# Altium PCB stm32f407pin.PcbDoc
Units mm, origin at the board's own origin, x right, y up, seen from the top; angles counter-clockwise.
Board outline 102.49 x 67.44 mm, 2 copper layers (Top Layer, Bottom Layer); 4 components, 100 nets, 200 pads, 0 vias.
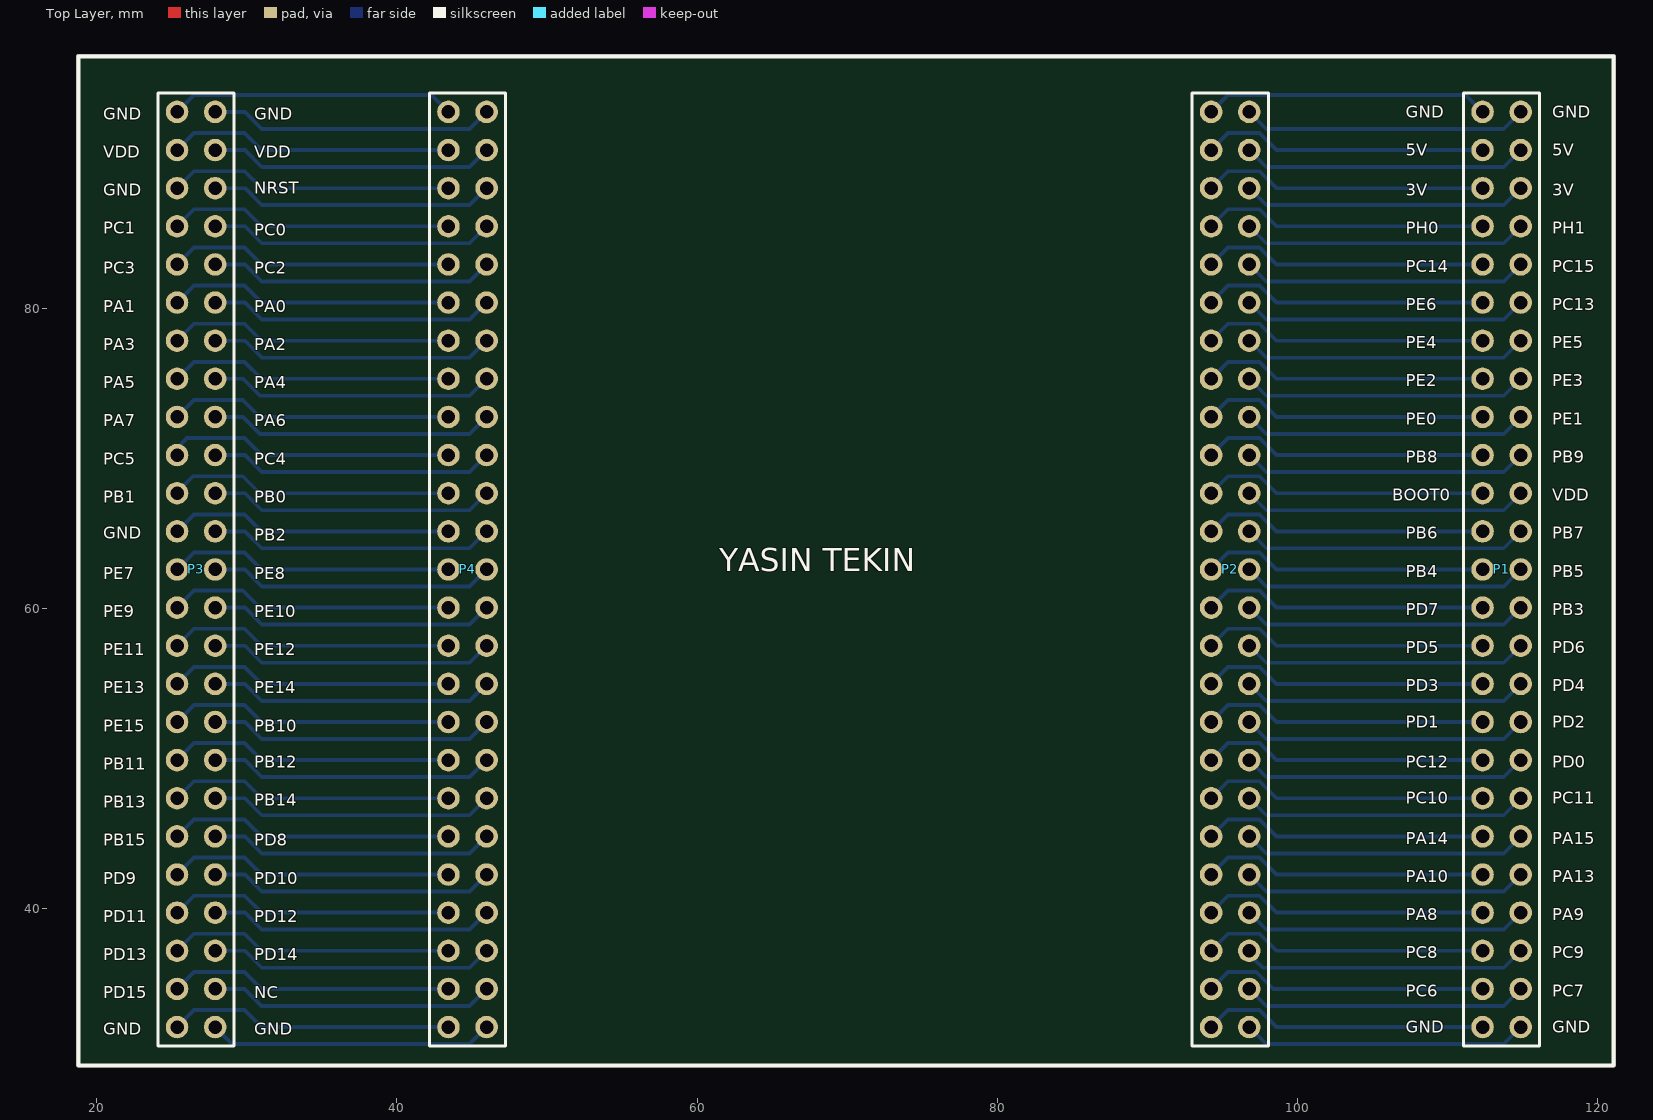
[diagram p0: Top Layer view]
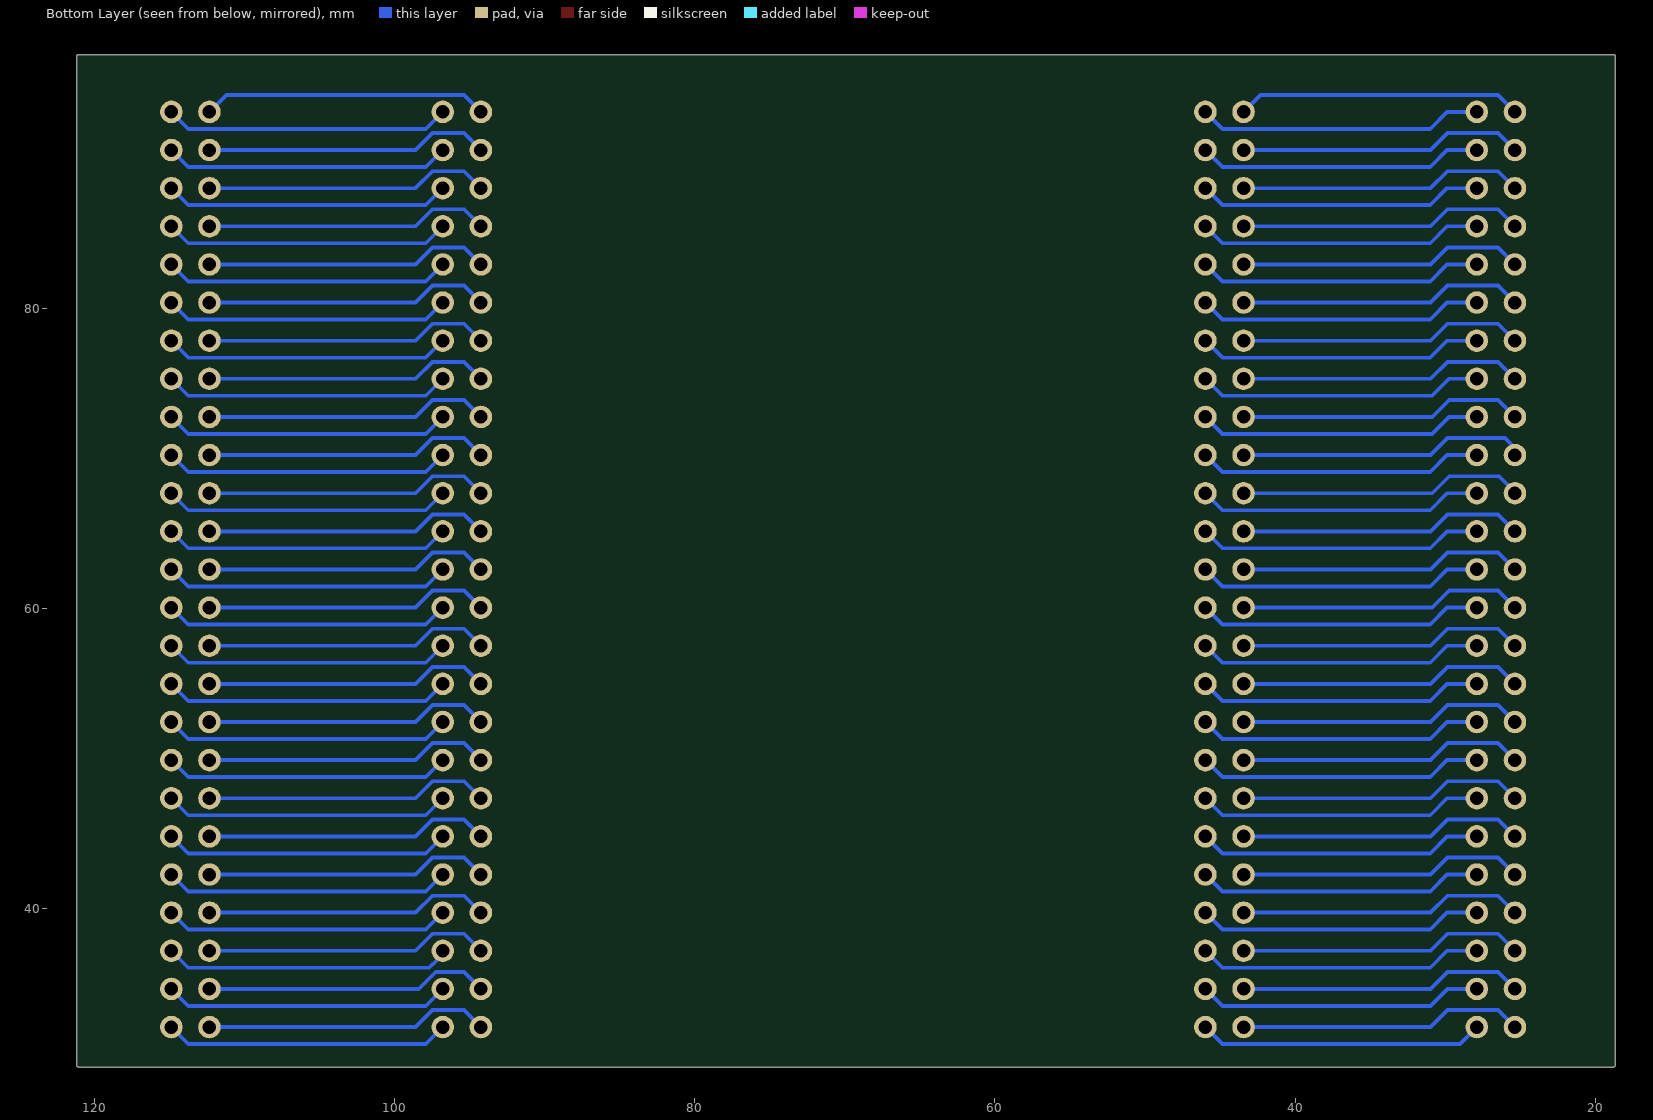
[diagram p1: Bottom Layer view, seen from below]

## Layer stack, top to bottom
Top Solder: solder mask 0.0102, Solder Resist, Dk 3.5
Top Layer: signal copper 0.0356
Dielectric 1: dielectric 0.32, FR-4, Dk 4.8
Bottom Layer: signal copper 0.0356
Bottom Solder: solder mask 0.0102, Solder Resist, Dk 3.5

## Board outline
18.796,29.464 cw(c18.796,29.591) 18.669,29.591 18.669,96.774 cw(c18.796,96.774) 18.796,96.901 121.031,96.901 cw(c121.031,96.774) 121.158,96.774 121.158,29.591 cw(c121.031,29.591) 121.031,29.464

## Design rules (kind name [scope] priority, off if disabled: settings)
Clearance [All] p1: gap=0.254
PolygonConnect [All] p1: connectstyle=Relief reliefconductorwidth=0.254 reliefentries=4 polygonreliefangle="90 Angle" airgapwidth=0.254
RoutingVias [All] p1: holewidth=0.711 width=1.27 viastyle="Through Hole" minholewidth=0.711 minwidth=1.27 maxholewidth=0.711 maxwidth=1.27
SolderMaskExpansion [All] p1: expansion=0.102
Width [All] p1: maxlimit=0.254 minlimit=0.254 preferedwidth=0.254
30 further rules are at their usual default settings.

## Components (designator, comment, footprint, x,y, rotation, side; value= is the part's Value field where it differs from the comment)
P1 "Header 25X2" HDR2X25 114.855,32.131 r90 top
P2 "Header 25X2" HDR2X25 96.773,32.131 r90 top
P3 "Header 25X2" HDR2X25 27.891,32.131 r90 top
P4 "Header 25X2" HDR2X25 45.973,32.131 r90 top

## Footprints (in the part's own frame and the unit in brackets; to place one, negate y for a bottom-side part, rotate by r counter-clockwise, add the part's x,y. Pads: shape width x height; smd on the part's side, far side on the other; paste and mask are expansions set on the pad)
HDR2X25 [mm] "Connector; Header; 25x2 Position"
  round 1.5 hole 0.9: 1(0,0) 2(0,2.54) 3(2.54,0) 4(2.54,2.54) 5(5.08,0) 6(5.08,2.54) 7(7.62,0) 8(7.62,2.54) 9(10.16,0) 10(10.16,2.54) 11(12.7,0) 12(12.7,2.54) 13(15.24,0) 14(15.24,2.54) 15(17.78,0) 16(17.78,2.54) 17(20.32,0) 18(20.32,2.54) 19(22.86,0) 20(22.86,2.54) 21(25.4,0) 22(25.4,2.54) 23(27.94,0) 24(27.94,2.54) 25(30.48,0) 26(30.48,2.54) 27(33.02,0) 28(33.02,2.54) 29(35.56,0) 30(35.56,2.54) 31(38.1,0) 32(38.1,2.54) 33(40.64,0) 34(40.64,2.54) 35(43.18,0) 36(43.18,2.54) 37(45.72,0) 38(45.72,2.54) 39(48.26,0) 40(48.26,2.54) 41(50.8,0) 42(50.8,2.54) 43(53.34,0) 44(53.34,2.54) 45(55.88,0) 46(55.88,2.54) 47(58.42,0) 48(58.42,2.54) 49(60.96,0) 50(60.96,2.54)
  silkscreen extent -1.27,-1.27 62.23,3.81

## Part data
P1 P2 P3 P4: "Header, 25-Pin, Dual row"

## Nets (pads, with @x,y where several pads share a name; then routed paths per layer and width w, separated by ;. In a path a pad name is that pad's centre, name@x,y a point inside that pad or via, vN(x,y) a via of type N, cw(c..) or ccw(c..) an arc to the next point about the centre after c; other vN are vias at no path point)
NETLABEL29: P1.2 P2.2 | length 19
  Bottom Layer w0.254: P2.2 95.364,33.262 97.464,33.262 98.595,32.131 P1.2
NETLABEL30: P1.4 P2.4 | length 19
  Bottom Layer w0.254: P2.4 95.364,35.802 97.241,35.802 98.372,34.671 P1.4
NETLABEL31: P1.6 P2.6 | length 19
  Bottom Layer w0.254: P2.6 95.364,38.342 97.464,38.342 98.595,37.211 P1.6
NETLABEL32: P1.8 P2.8 | length 19
  Bottom Layer w0.254: P2.8 95.364,40.882 97.464,40.882 98.595,39.751 P1.8
NETLABEL33: P1.10 P2.10 | length 19
  Bottom Layer w0.254: P2.10 95.364,43.422 97.464,43.422 98.595,42.291 P1.10
NETLABEL34: P1.12 P2.12 | length 19
  Bottom Layer w0.254: P2.12 95.364,45.962 97.464,45.962 98.595,44.831 P1.12
NETLABEL35: P1.14 P2.14 | length 19
  Bottom Layer w0.254: P2.14 95.364,48.502 97.464,48.502 98.595,47.371 P1.14
NETLABEL36: P1.16 P2.16 | length 19
  Bottom Layer w0.254: P2.16 95.364,51.042 97.464,51.042 98.595,49.911 P1.16
NETLABEL37: P1.18 P2.18 | length 19
  Bottom Layer w0.254: P2.18 95.364,53.582 97.464,53.582 98.595,52.451 P1.18
NETLABEL38: P1.20 P2.20 | length 19
  Bottom Layer w0.254: P2.20 95.364,56.122 97.464,56.122 98.595,54.991 P1.20
NETLABEL39: P1.22 P2.22 | length 19
  Bottom Layer w0.254: P2.22 95.364,58.662 97.464,58.662 98.595,57.531 P1.22
NETLABEL40: P1.24 P2.24 | length 19
  Bottom Layer w0.254: P2.24 95.364,61.202 97.464,61.202 98.595,60.071 P1.24
NETLABEL41: P1.26 P2.26 | length 19
  Bottom Layer w0.254: P2.26 95.364,63.742 97.464,63.742 98.595,62.611 P1.26
NETLABEL42: P1.28 P2.28 | length 19
  Bottom Layer w0.254: P2.28 95.364,66.282 97.464,66.282 98.595,65.151 P1.28
NETLABEL43: P1.30 P2.30 | length 19
  Bottom Layer w0.254: P2.30 95.364,68.822 97.464,68.822 98.595,67.691 P1.30
NETLABEL44: P1.32 P2.32 | length 19
  Bottom Layer w0.254: P2.32 95.364,71.362 97.464,71.362 98.595,70.231 P1.32
NETLABEL45: P1.34 P2.34 | length 19
  Bottom Layer w0.254: P2.34 95.364,73.902 97.464,73.902 98.595,72.771 P1.34
NETLABEL46: P1.36 P2.36 | length 19
  Bottom Layer w0.254: P2.36 95.364,76.442 97.464,76.442 98.595,75.311 P1.36
NETLABEL47: P1.38 P2.38 | length 19
  Bottom Layer w0.254: P2.38 95.364,78.982 97.464,78.982 98.595,77.851 P1.38
NETLABEL48: P1.40 P2.40 | length 19
  Bottom Layer w0.254: P2.40 95.364,81.522 97.464,81.522 98.595,80.391 P1.40
NETLABEL49: P1.42 P2.42 | length 19
  Bottom Layer w0.254: P2.42 95.364,84.062 97.464,84.062 98.595,82.931 P1.42
NETLABEL50: P1.44 P2.44 | length 19
  Bottom Layer w0.254: P2.44 95.364,86.602 97.464,86.602 98.595,85.471 P1.44
NETLABEL51: P1.46 P2.46 | length 19
  Bottom Layer w0.254: P2.46 95.364,89.142 97.464,89.142 98.595,88.011 P1.46
NETLABEL52: P1.48 P2.48 | length 19
  Bottom Layer w0.254: P2.48 95.364,91.682 97.464,91.682 98.595,90.551 P1.48
NETLABEL53: P1.50 P2.50 | length 19
  Bottom Layer w0.254: P2.50 95.364,94.222 111.184,94.222 P1.50
NETLABEL66: P1.1 P2.1 | length 19
  Bottom Layer w0.254: P2.1 97.904,31 113.724,31 P1.1
NETLABEL67: P1.3 P2.3 | length 19
  Bottom Layer w0.254: P2.3 97.904,33.54 113.724,33.54 P1.3
NETLABEL68: P1.5 P2.5 | length 19.2
  Bottom Layer w0.254: P2.5 96.773,36.958 97.421,36.31 97.452,36.31 97.682,36.08 113.724,36.08 P1.5
NETLABEL69: P1.7 P2.7 | length 19
  Bottom Layer w0.254: P2.7 97.904,38.62 113.724,38.62 P1.7
NETLABEL70: P1.9 P2.9 | length 19
  Bottom Layer w0.254: P2.9 97.904,41.16 113.724,41.16 P1.9
NETLABEL71: P1.11 P2.11 | length 19
  Bottom Layer w0.254: P2.11 97.904,43.7 113.724,43.7 P1.11
NETLABEL72: P1.13 P2.13 | length 19
  Bottom Layer w0.254: P2.13 97.904,46.24 113.724,46.24 P1.13
NETLABEL73: P1.15 P2.15 | length 19
  Bottom Layer w0.254: P2.15 97.904,48.78 113.724,48.78 P1.15
NETLABEL74: P1.17 P2.17 | length 19
  Bottom Layer w0.254: P2.17 97.904,51.32 113.724,51.32 P1.17
NETLABEL75: P1.19 P2.19 | length 19
  Bottom Layer w0.254: P2.19 97.904,53.86 113.724,53.86 P1.19
NETLABEL76: P1.21 P2.21 | length 19
  Bottom Layer w0.254: P2.21 97.904,56.4 113.724,56.4 P1.21
NETLABEL77: P1.23 P2.23 | length 19
  Bottom Layer w0.254: P2.23 97.904,58.94 113.724,58.94 P1.23
NETLABEL78: P1.25 P2.25 | length 19
  Bottom Layer w0.254: P2.25 97.904,61.48 113.724,61.48 P1.25
NETLABEL79: P1.27 P2.27 | length 19
  Bottom Layer w0.254: P2.27 97.904,64.02 113.724,64.02 P1.27
NETLABEL80: P1.29 P2.29 | length 19
  Bottom Layer w0.254: P2.29 97.904,66.56 113.724,66.56 P1.29
NETLABEL81: P1.31 P2.31 | length 19
  Bottom Layer w0.254: P2.31 97.904,69.1 113.724,69.1 P1.31
NETLABEL82: P1.33 P2.33 | length 19
  Bottom Layer w0.254: P2.33 97.904,71.64 113.724,71.64 P1.33
NETLABEL83: P1.35 P2.35 | length 19
  Bottom Layer w0.254: P2.35 97.904,74.18 113.724,74.18 P1.35
NETLABEL84: P1.37 P2.37 | length 19
  Bottom Layer w0.254: P2.37 97.904,76.72 113.724,76.72 P1.37
NETLABEL85: P1.39 P2.39 | length 19
  Bottom Layer w0.254: P2.39 97.904,79.26 113.724,79.26 P1.39
NETLABEL86: P1.41 P2.41 | length 19
  Bottom Layer w0.254: P2.41 97.904,81.8 113.724,81.8 P1.41
NETLABEL87: P1.43 P2.43 | length 19
  Bottom Layer w0.254: P2.43 97.904,84.34 113.724,84.34 P1.43
NETLABEL88: P1.45 P2.45 | length 19
  Bottom Layer w0.254: P2.45 97.904,86.88 113.724,86.88 P1.45
NETLABEL89: P1.47 P2.47 | length 19
  Bottom Layer w0.254: P2.47 97.904,89.42 113.724,89.42 P1.47
NETLABEL90: P1.49 P2.49 | length 19
  Bottom Layer w0.254: P2.49 97.904,91.96 113.724,91.96 P1.49
NETLABEL91: P3.1 P4.1 | length 19
  Bottom Layer w0.254: P3.1 29.022,31 44.842,31 P4.1
NETLABEL92: P3.3 P4.3 | length 19
  Bottom Layer w0.254: P3.3 29.845,34.671 30.976,33.54 44.842,33.54 P4.3
NETLABEL93: P3.5 P4.5 | length 19
  Bottom Layer w0.254: P3.5 29.869,37.211 31,36.08 44.842,36.08 P4.5
NETLABEL94: P3.7 P4.7 | length 19
  Bottom Layer w0.254: P3.7 29.869,39.751 31,38.62 44.842,38.62 P4.7
NETLABEL95: P3.9 P4.9 | length 19
  Bottom Layer w0.254: P3.9 29.869,42.291 31,41.16 44.842,41.16 P4.9
NETLABEL96: P3.11 P4.11 | length 19
  Bottom Layer w0.254: P3.11 29.869,44.831 31,43.7 44.842,43.7 P4.11
NETLABEL97: P3.13 P4.13 | length 19
  Bottom Layer w0.254: P3.13 29.869,47.371 31,46.24 44.842,46.24 P4.13
NETLABEL98: P3.15 P4.15 | length 19
  Bottom Layer w0.254: P3.15 29.869,49.911 31,48.78 44.842,48.78 P4.15
NETLABEL99: P3.17 P4.17 | length 19
  Bottom Layer w0.254: P3.17 29.869,52.451 31,51.32 44.842,51.32 P4.17
NETLABEL100: P3.19 P4.19 | length 19
  Bottom Layer w0.254: P3.19 29.869,54.991 31,53.86 44.842,53.86 P4.19
NETLABEL101: P3.21 P4.21 | length 19
  Bottom Layer w0.254: P3.21 29.869,57.531 31,56.4 44.842,56.4 P4.21
NETLABEL102: P3.23 P4.23 | length 19
  Bottom Layer w0.254: P3.23 29.869,60.071 31,58.94 44.842,58.94 P4.23
NETLABEL103: P3.25 P4.25 | length 19
  Bottom Layer w0.254: P3.25 29.869,62.611 31,61.48 44.842,61.48 P4.25
NETLABEL104: P3.27 P4.27 | length 19
  Bottom Layer w0.254: P3.27 29.869,65.151 31,64.02 44.842,64.02 P4.27
NETLABEL105: P3.29 P4.29 | length 19
  Bottom Layer w0.254: P3.29 29.869,67.691 31,66.56 44.842,66.56 P4.29
NETLABEL106: P3.31 P4.31 | length 19
  Bottom Layer w0.254: P3.31 29.869,70.231 31,69.1 44.842,69.1 P4.31
NETLABEL107: P3.33 P4.33 | length 19
  Bottom Layer w0.254: P3.33 29.742,72.771 30.873,71.64 44.842,71.64 P4.33
NETLABEL108: P3.35 P4.35 | length 19
  Bottom Layer w0.254: P3.35 29.742,75.311 30.873,74.18 44.842,74.18 P4.35
NETLABEL109: P3.37 P4.37 | length 19
  Bottom Layer w0.254: P3.37 29.869,77.851 31,76.72 44.842,76.72 P4.37
NETLABEL110: P3.39 P4.39 | length 19
  Bottom Layer w0.254: P3.39 29.869,80.391 31,79.26 44.842,79.26 P4.39
NETLABEL111: P3.41 P4.41 | length 19
  Bottom Layer w0.254: P3.41 29.869,82.931 31,81.8 44.842,81.8 P4.41
NETLABEL112: P3.43 P4.43 | length 19
  Bottom Layer w0.254: P3.43 29.869,85.471 31,84.34 44.842,84.34 P4.43
NETLABEL113: P3.45 P4.45 | length 19
  Bottom Layer w0.254: P3.45 29.869,88.011 31,86.88 44.842,86.88 P4.45
NETLABEL114: P3.47 P4.47 | length 19
  Bottom Layer w0.254: P3.47 29.869,90.551 31,89.42 44.842,89.42 P4.47
NETLABEL115: P3.49 P4.49 | length 19
  Bottom Layer w0.254: P3.49 29.869,93.091 31,91.96 44.842,91.96 P4.49
NETLABEL116: P3.2 P4.2 | length 19
  Bottom Layer w0.254: P3.2 26.482,33.262 29.857,33.262 30.988,32.131 P4.2
NETLABEL117: P3.4 P4.4 | length 19
  Bottom Layer w0.254: P3.4 26.482,35.802 29.857,35.802 30.988,34.671 P4.4
NETLABEL118: P3.6 P4.6 | length 19
  Bottom Layer w0.254: P3.6 26.482,38.342 29.857,38.342 30.988,37.211 P4.6
NETLABEL119: P3.8 P4.8 | length 19
  Bottom Layer w0.254: P3.8 26.482,40.882 29.857,40.882 30.988,39.751 P4.8
NETLABEL120: P3.10 P4.10 | length 19
  Bottom Layer w0.254: P3.10 26.482,43.422 29.857,43.422 30.988,42.291 P4.10
NETLABEL121: P3.12 P4.12 | length 19
  Bottom Layer w0.254: P3.12 26.482,45.962 29.857,45.962 30.988,44.831 P4.12
NETLABEL122: P3.14 P4.14 | length 19
  Bottom Layer w0.254: P3.14 26.482,48.502 29.857,48.502 30.988,47.371 P4.14
NETLABEL123: P3.16 P4.16 | length 19
  Bottom Layer w0.254: P3.16 26.482,51.042 29.857,51.042 30.988,49.911 P4.16
NETLABEL124: P3.18 P4.18 | length 19
  Bottom Layer w0.254: P3.18 26.482,53.582 29.857,53.582 30.988,52.451 P4.18
NETLABEL125: P3.20 P4.20 | length 19
  Bottom Layer w0.254: P3.20 26.482,56.122 29.857,56.122 30.988,54.991 P4.20
NETLABEL126: P3.22 P4.22 | length 19
  Bottom Layer w0.254: P3.22 26.482,58.662 29.857,58.662 30.988,57.531 P4.22
NETLABEL127: P3.24 P4.24 | length 19
  Bottom Layer w0.254: P3.24 26.482,61.202 29.73,61.202 30.861,60.071 P4.24
NETLABEL128: P3.26 P4.26 | length 19
  Bottom Layer w0.254: P3.26 26.482,63.742 29.857,63.742 30.988,62.611 P4.26
NETLABEL129: P3.28 P4.28 | length 19
  Bottom Layer w0.254: P3.28 26.482,66.282 29.857,66.282 30.988,65.151 P4.28
NETLABEL130: P3.30 P4.30 | length 19.1
  Bottom Layer w0.254: P3.30 25.351,67.769 26.404,68.822 29.73,68.822 30.861,67.691 P4.30
NETLABEL131: P3.32 P4.32 | length 19.3
  Bottom Layer w0.254: P3.32 25.351,70.69 26.023,71.362 29.857,71.362 30.988,70.231 P4.32
NETLABEL132: P3.34 P4.34 | length 19
  Bottom Layer w0.254: P3.34 26.482,73.902 29.73,73.902 30.861,72.771 P4.34
NETLABEL134: P3.36 P4.36 | length 19
  Bottom Layer w0.254: P3.36 26.482,76.442 29.857,76.442 30.988,75.311 P4.36
NETLABEL135: P3.38 P4.38 | length 19
  Bottom Layer w0.254: P3.38 26.482,78.982 29.857,78.982 30.988,77.851 P4.38
NETLABEL136: P3.40 P4.40 | length 19
  Bottom Layer w0.254: P3.40 26.482,81.522 29.857,81.522 30.988,80.391 P4.40
NETLABEL137: P3.42 P4.42 | length 19
  Bottom Layer w0.254: P3.42 26.482,84.062 29.857,84.062 30.988,82.931 P4.42
NETLABEL138: P3.44 P4.44 | length 19
  Bottom Layer w0.254: P3.44 26.482,86.602 29.857,86.602 30.988,85.471 P4.44
NETLABEL139: P3.46 P4.46 | length 19
  Bottom Layer w0.254: P3.46 26.482,89.142 29.857,89.142 30.988,88.011 P4.46
NETLABEL140: P3.48 P4.48 | length 19
  Bottom Layer w0.254: P3.48 26.482,91.682 29.857,91.682 30.988,90.551 P4.48
NETLABEL141: P3.50 P4.50 | length 19
  Bottom Layer w0.254: P3.50 26.482,94.222 42.302,94.222 P4.50

## Silkscreen, mask and mechanical layers (free items; w line width, h text height)
Top Overlay:
  lines w0.254: 18.796,29.591 121.031,29.591 121.031,96.774 18.796,96.774 18.796,29.591
  text "GND" at 107.188,92.71 h0.8
  text "GND" at 116.967,92.71 h0.8
  text "GND" at 20.447,92.583 h0.8
  text "GND" at 30.48,92.583 h0.8
  text "5V" at 107.188,90.17 h0.8
  text "5V" at 116.967,90.17 h0.8
  text "VDD" at 20.447,90.043 h0.8
  text "VDD" at 30.48,90.043 h0.8
  text "NRST" at 30.48,87.63 h0.8
  text "GND" at 20.447,87.503 h0.8
  text "3V" at 107.188,87.503 h0.8
  text "3V" at 116.967,87.503 h0.8
  text "PC1" at 20.447,84.963 h0.8
  text "PH0" at 107.188,84.963 h0.8
  text "PH1" at 116.967,84.963 h0.8
  text "PC0" at 30.48,84.836 h0.8
  text "PC14" at 107.188,82.423 h0.8
  text "PC15" at 116.967,82.423 h0.8
  text "PC3" at 20.447,82.296 h0.8
  text "PC2" at 30.48,82.296 h0.8
  text "PE6" at 107.188,79.883 h0.8
  text "PC13" at 116.967,79.883 h0.8
  text "PA1" at 20.447,79.756 h0.8
  text "PA0" at 30.48,79.756 h0.8
  text "PE4" at 107.188,77.343 h0.8
  text "PE5" at 116.967,77.343 h0.8
  text "PA3" at 20.447,77.216 h0.8
  text "PA2" at 30.48,77.216 h0.8
  text "PE2" at 107.188,74.803 h0.8
  text "PE3" at 116.967,74.803 h0.8
  text "PA5" at 20.447,74.676 h0.8
  text "PA4" at 30.48,74.676 h0.8
  text "PE0" at 107.188,72.263 h0.8
  text "PE1" at 116.967,72.263 h0.8
  text "PA7" at 20.447,72.136 h0.8
  text "PA6" at 30.48,72.136 h0.8
  text "PB8" at 107.188,69.723 h0.8
  text "PB9" at 116.967,69.723 h0.8
  text "PC5" at 20.447,69.596 h0.8
  text "PC4" at 30.48,69.596 h0.8
  text "BOOT0" at 106.299,67.183 h0.8
  text "VDD" at 116.967,67.183 h0.8
  text "PB1" at 20.447,67.056 h0.8
  text "PB0" at 30.48,67.056 h0.8
  text "GND" at 20.447,64.643 h0.8
  text "PB6" at 107.188,64.643 h0.8
  text "PB7" at 116.967,64.643 h0.8
  text "PB2" at 30.48,64.516 h0.8
  text "YASIN TEKIN" at 61.468,62.484 h1.52
  text "PB4" at 107.188,62.103 h0.8
  text "PB5" at 116.967,62.103 h0.8
  text "PE7" at 20.447,61.976 h0.8
  text "PE8" at 30.48,61.976 h0.8
  text "PD7" at 107.188,59.563 h0.8
  text "PB3" at 116.967,59.563 h0.8
  text "PE9" at 20.447,59.436 h0.8
  text "PE10" at 30.48,59.436 h0.8
  text "PD5" at 107.188,57.023 h0.8
  text "PD6" at 116.967,57.023 h0.8
  text "PE11" at 20.447,56.896 h0.8
  text "PE12" at 30.48,56.896 h0.8
  text "PD3" at 107.188,54.483 h0.8
  text "PD4" at 116.967,54.483 h0.8
  text "PE13" at 20.447,54.356 h0.8
  text "PE14" at 30.48,54.356 h0.8
  text "PD1" at 107.188,52.07 h0.8
  text "PD2" at 116.967,52.07 h0.8
  text "PE15" at 20.447,51.816 h0.8
  text "PB10" at 30.48,51.816 h0.8
  text "PB12" at 30.48,49.403 h0.8
  text "PC12" at 107.188,49.403 h0.8
  text "PD0" at 116.967,49.403 h0.8
  text "PB11" at 20.447,49.276 h0.8
  text "PC10" at 107.188,46.99 h0.8
  text "PC11" at 116.967,46.99 h0.8
  text "PB14" at 30.48,46.863 h0.8
  text "PB13" at 20.447,46.736 h0.8
  text "PA14" at 107.188,44.323 h0.8
  text "PA15" at 116.967,44.323 h0.8
  text "PB15" at 20.447,44.196 h0.8
  text "PD8" at 30.48,44.196 h0.8
  text "PA10" at 107.188,41.783 h0.8
  text "PA13" at 116.967,41.783 h0.8
  text "PD9" at 20.447,41.656 h0.8
  text "PD10" at 30.48,41.656 h0.8
  text "PA8" at 107.188,39.243 h0.8
  text "PA9" at 116.967,39.243 h0.8
  text "PD11" at 20.447,39.116 h0.8
  text "PD12" at 30.48,39.116 h0.8
  text "PC8" at 107.188,36.703 h0.8
  text "PC9" at 116.967,36.703 h0.8
  text "PD13" at 20.447,36.576 h0.8
  text "PD14" at 30.48,36.576 h0.8
  text "PC6" at 107.188,34.163 h0.8
  text "PC7" at 116.967,34.163 h0.8
  text "PD15" at 20.447,34.036 h0.8
  text "NC" at 30.48,34.036 h0.8
  text "GND" at 107.188,31.75 h0.8
  text "GND" at 116.967,31.75 h0.8
  text "GND" at 20.447,31.623 h0.8
  text "GND" at 30.48,31.623 h0.8